# Altium PCB control_block.PcbDoc
Units mm, origin at the board's own origin, x right, y up, seen from the top; angles counter-clockwise.
Board outline 42.5 x 55 mm, 2 copper layers (Top Layer, Bottom Layer), stack 1.5 mm thick; 39 components, 30 nets, 160 pads, 20 vias.
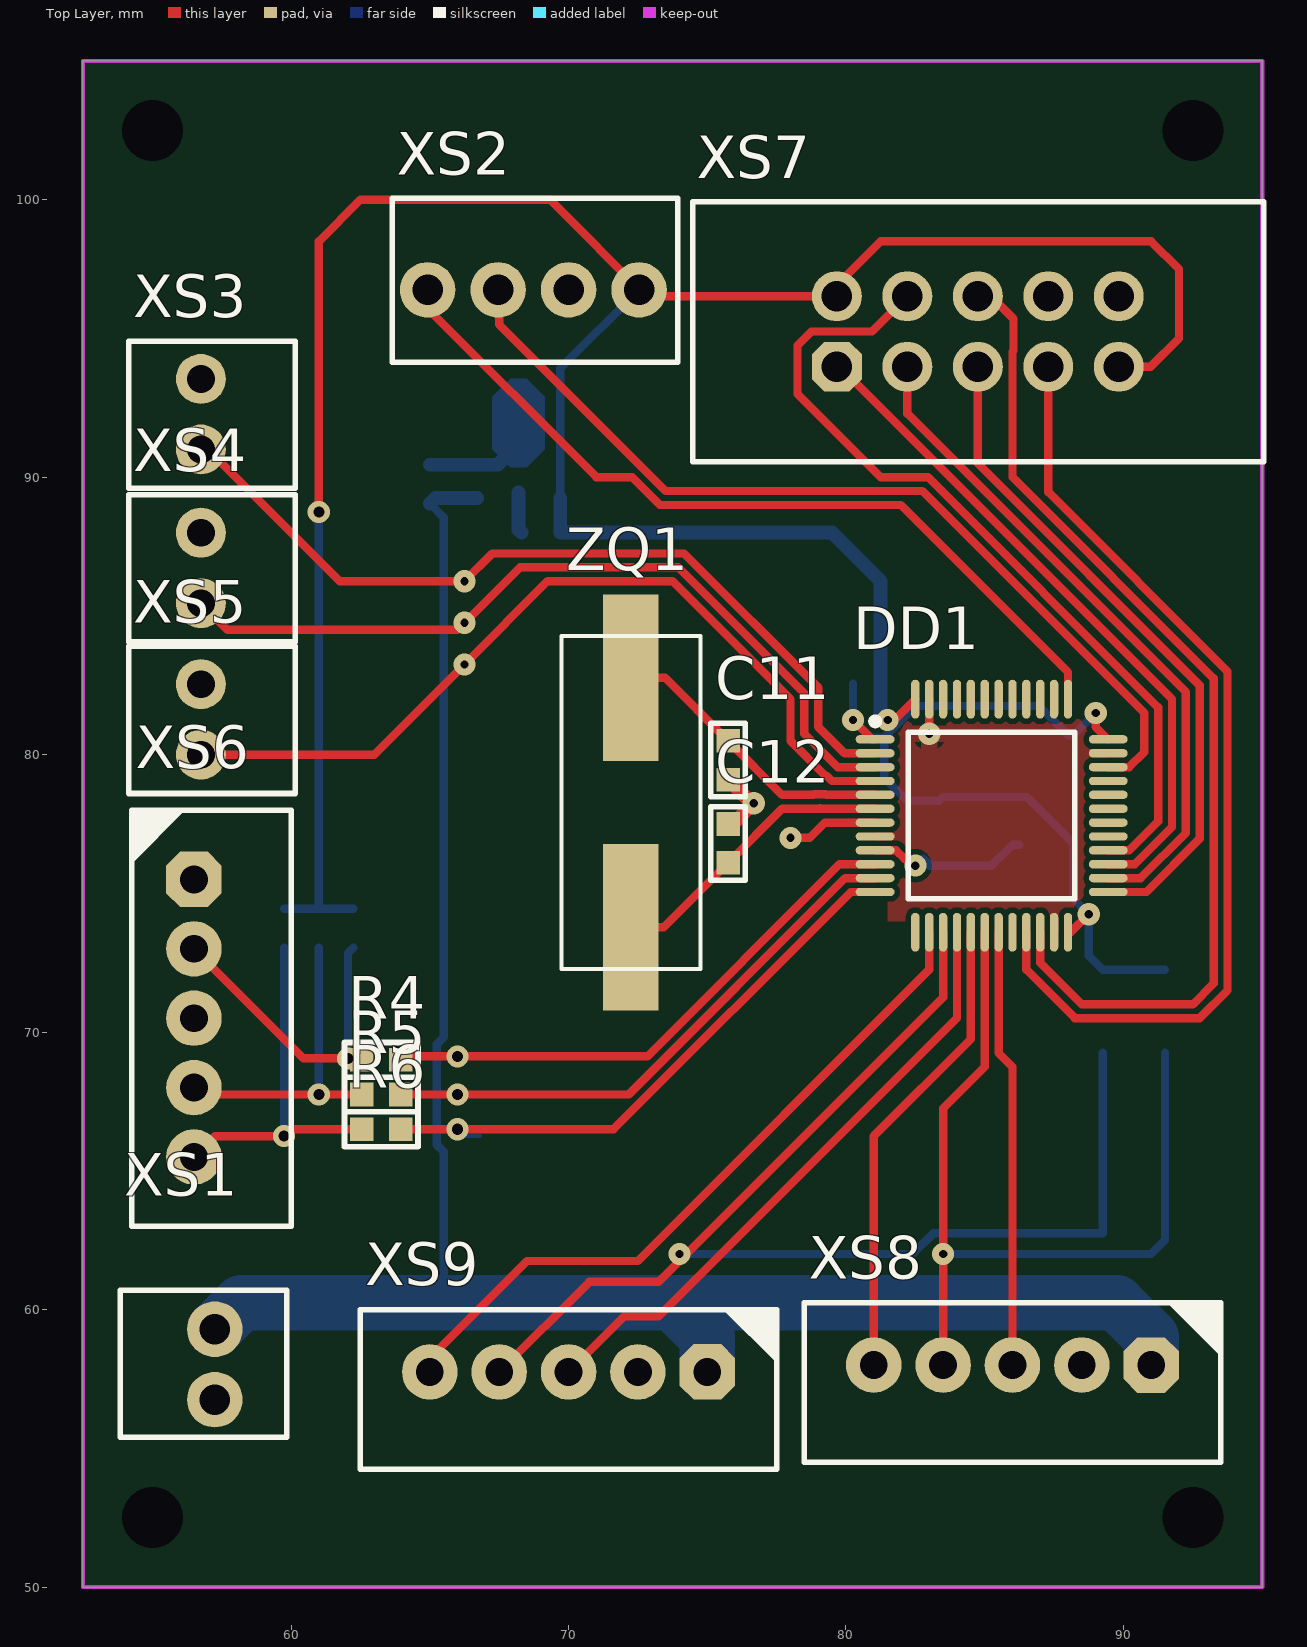
[diagram p0: Top Layer view]
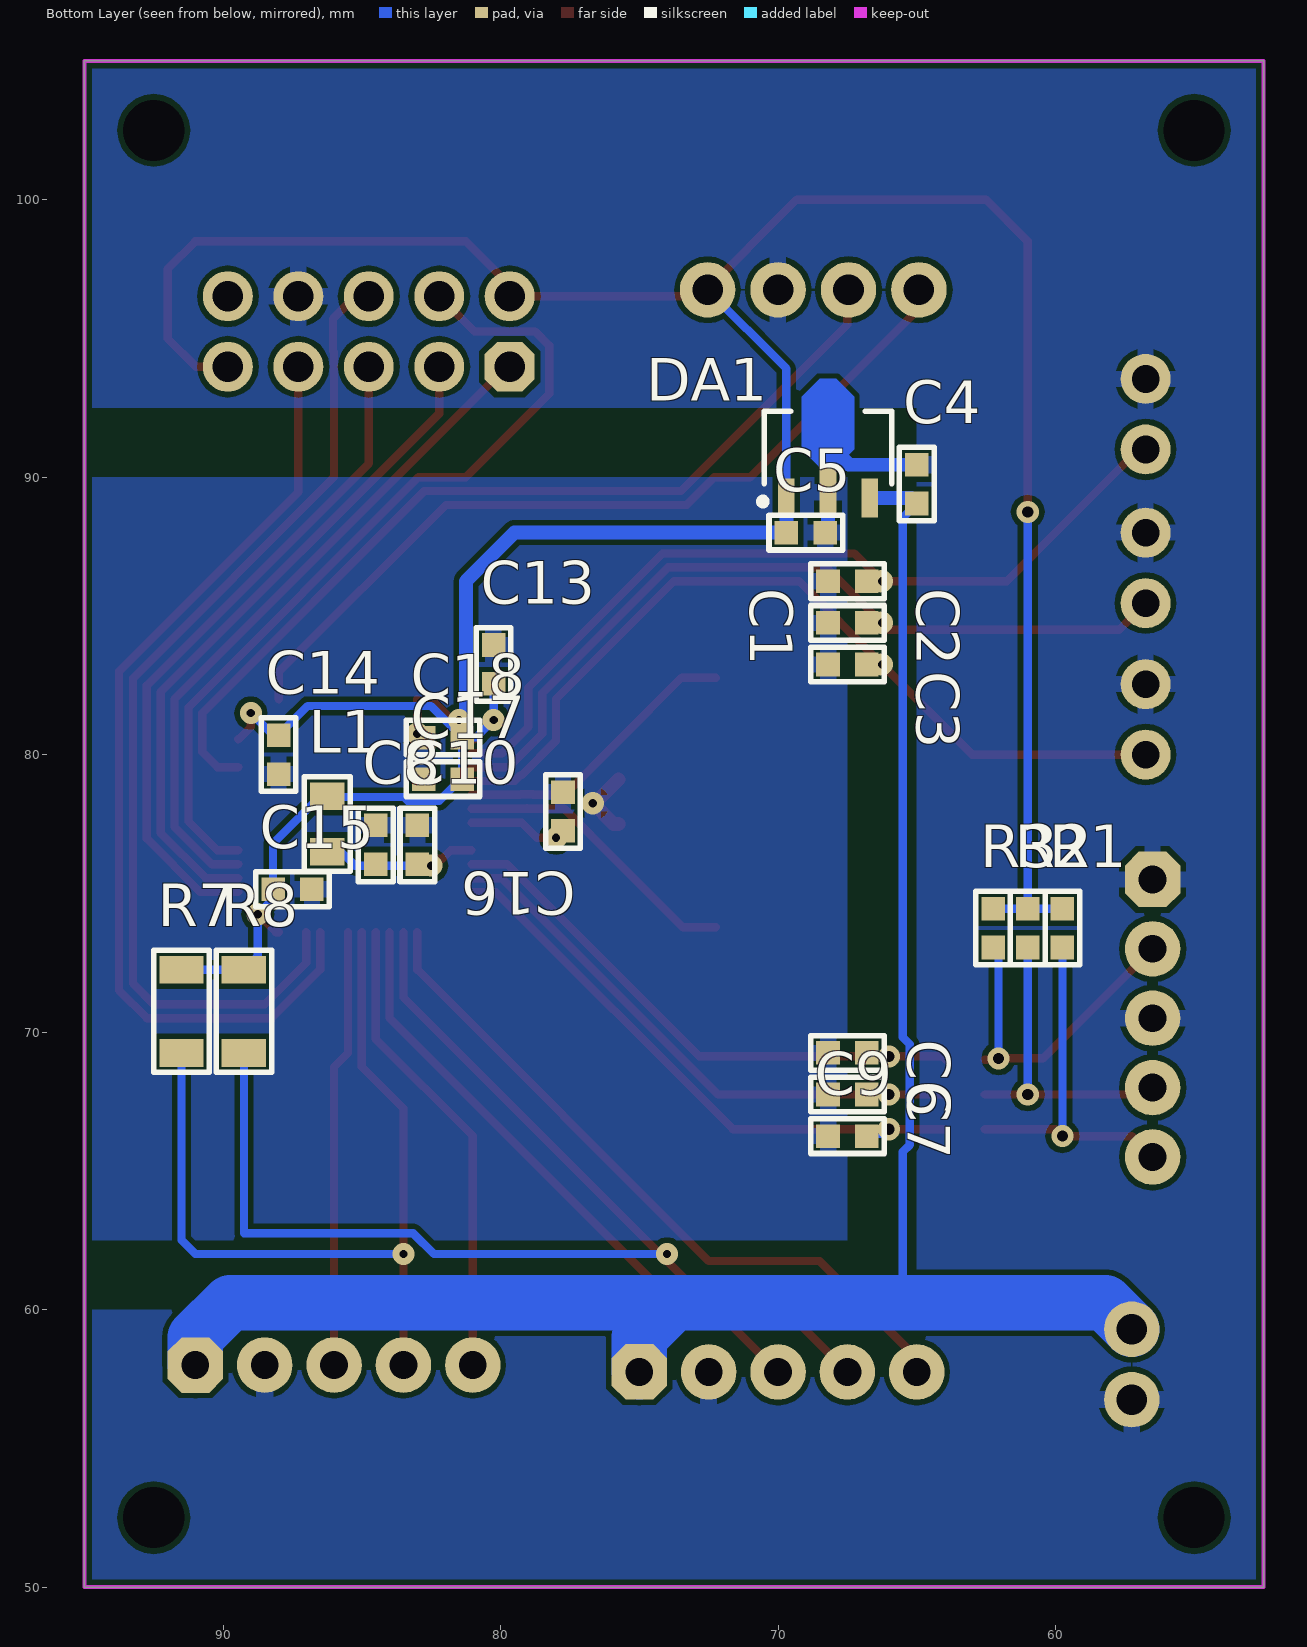
[diagram p1: Bottom Layer view, seen from below]
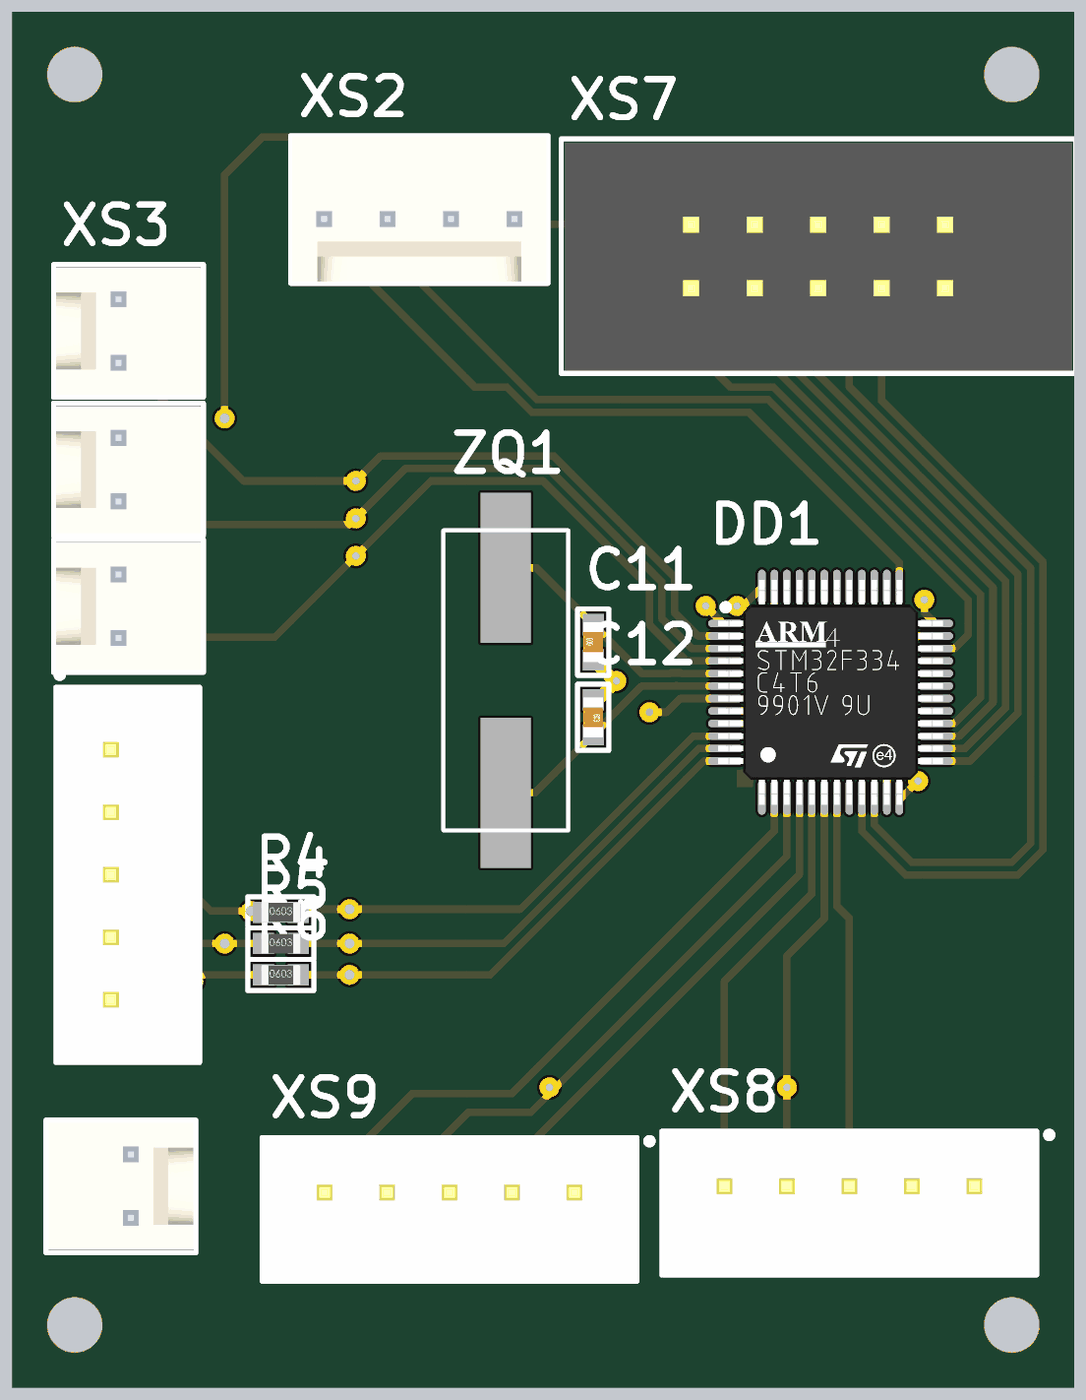
[diagram p2: 3D render of the assembled board from above, using the file's embedded part models]
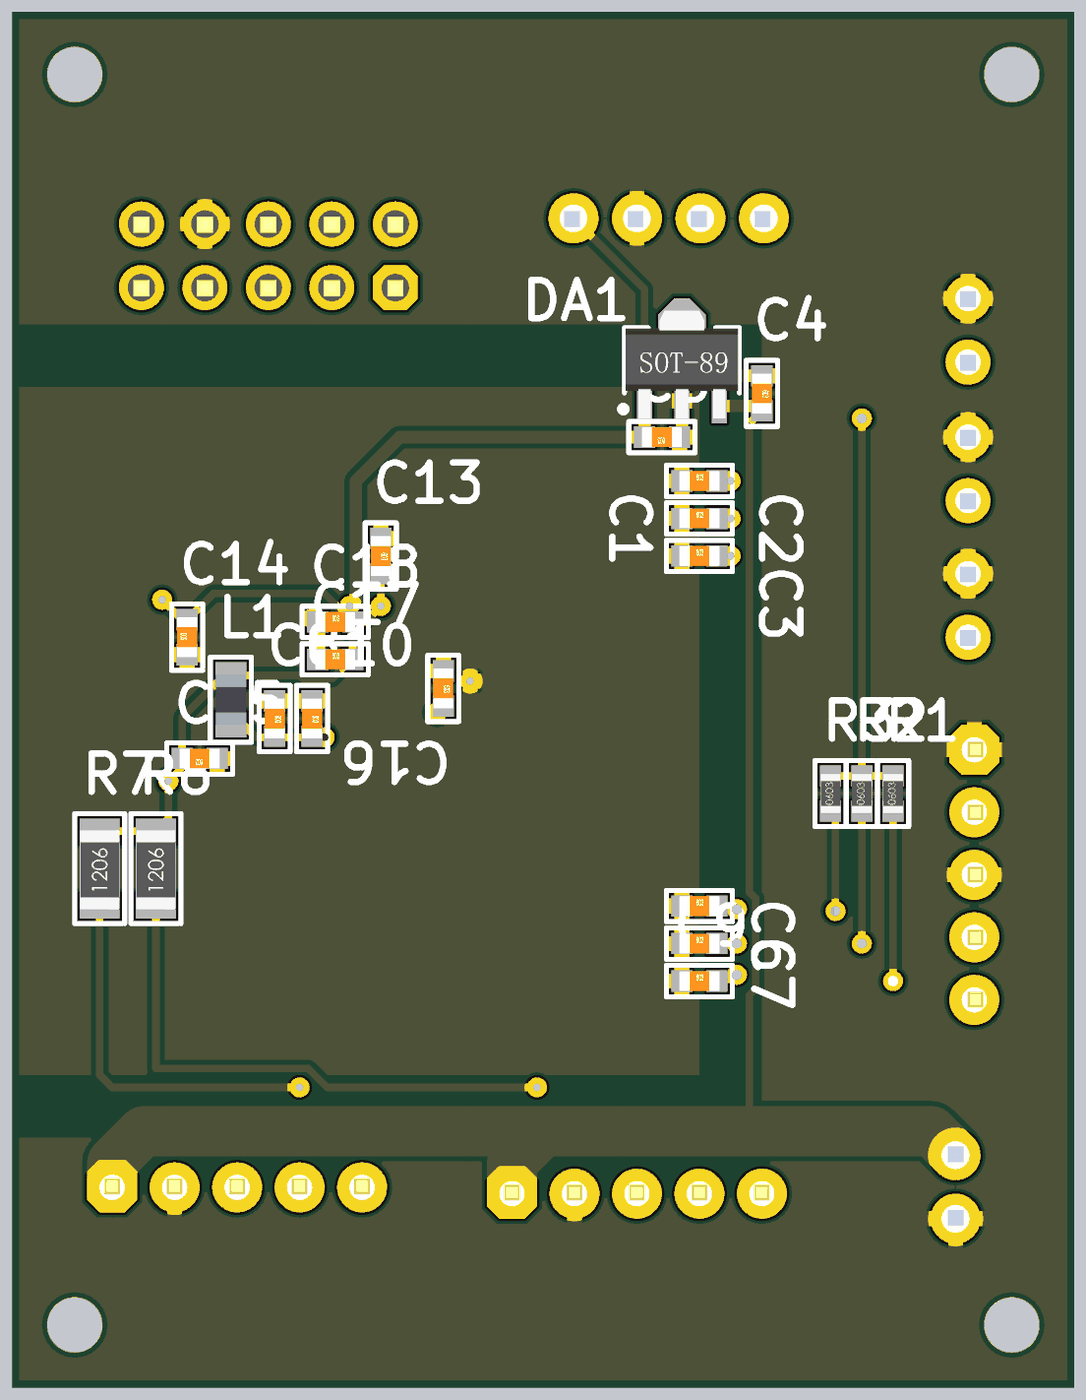
[diagram p3: 3D render of the assembled board from below, using the file's embedded part models]

## Layer stack, top to bottom
Top Layer: signal copper (thickness not stored)
Dielectric 1: dielectric 1.5, FR-4, Dk 4.8
Bottom Layer: signal copper (thickness not stored)

## Board outline
52.5,50 52.5,105 95,105 95,50

## Design rules (kind name [scope] priority, off if disabled: settings)
Clearance [All] p1: gap=0.2 ignorepadtopadclearanceinfootprint=TRUE except(0: Arc-Hole Track-Hole SMDPad-Hole THPad-Hole Via-Hole Fill-Hole Poly-Hole Region-Hole Text-Hole)
ComponentClearance [InComponent('No Component') vs InComponent('No Component')] p1: gap=0.254 collisioncheckmode=3 verticalgap=0.254 showdistances=FALSE
PolygonConnect [All] p1: connectstyle=Relief reliefconductorwidth=0.6 reliefentries=4 polygonreliefangle="90 Angle" airgapwidth=0.2
RoutingVias [All] p1: holewidth=0.5 width=1 viastyle="Through Hole" minholewidth=0.3 minwidth=0.8 maxholewidth=0.7 maxwidth=1.2
SolderMaskExpansion [All] p1: expansion=0.102
Width [All] p1: maxlimit=5 minlimit=0.15 preferedwidth=0.3 minimp=50.000000 maximp=50.000000 favimp=50.000000
29 further rules are at their usual default settings.

## Components (designator, comment, footprint, x,y, rotation, side; value= is the part's Value field where it differs from the comment)
C1 "100 нФ" "CAP: 0603" 67.5,86.25 r180 bottom
C2 "100 нФ" "CAP: 0603" 67.5,84.75 r180 bottom
C3 "100 нФ" "CAP: 0603" 67.5,83.25 r180 bottom
C4 "0.330 мкФ" "CAP: 0603" 65,89.75 r270 bottom
C5 "100 нФ" "CAP: 0603" 69,88 r0 bottom
C6 "100 нФ" "CAP: 0603" 67.5,69.25 r180 bottom
C7 "100 нФ" "CAP: 0603" 67.5,67.75 r180 bottom
C8 "1 мкФ" "CAP: 0603" 84.5,76.75 r270 bottom
C9 "100 нФ" "CAP: 0603" 67.5,66.25 r180 bottom
C10 "10 нФ" "CAP: 0603" 83,76.75 r270 bottom
C11 "22 пФ" "CAP: 0603" 75.75,79.8 r90 top
C12 "22 пФ" "CAP: 0603" 75.75,76.8 r270 top
C13 "100 нФ" "CAP: 0603" 80.25,83.25 r270 bottom
C14 "100 нФ" "CAP: 0603" 88,80 r90 bottom
C15 "100 нФ" "CAP: 0603" 87.5,75.15 r0 bottom
C16 "100 нФ" "CAP: 0603" 77.75,77.95 r270 bottom
C17 "100 нФ" "CAP: 0603" 82.075,79.115 r180 bottom
C18 "4.7 мкФ" "CAP: 0603" 82.075,80.615 r180 bottom
DA1 "78xx" SOT89 68.2,91.05 r90 bottom
DD1 "STM32F103C8T6" 48-LQFP 85.25,77.8 r0 top
L1 "10 мкГн" "IND: 0805" 86.25,77.5 r90 bottom
R1 "Res" "RES: 0603" 59.75,73.75 r90 bottom
R2 "Res" "RES: 0603" 61,73.75 r90 bottom
R3 "Res" "RES: 0603" 62.25,73.75 r90 bottom
R4 "Res" "RES: 0603" 63.25,69 r0 top
R5 "Res" "RES: 0603" 63.25,67.75 r0 top
R6 "Res" "RES: 0603" 63.25,66.5 r0 top
R7 "Res" "RES: 1206" 91.5,70.75 r90 bottom
R8 "Res" "RES: 1206" 89.25,70.75 r90 bottom
XS1 "X2" "CON: WF-02"#1 57.25,59.29 r270 top
XS2 "X4" "CON: WF-04" 72.54,96.75 r180 top
XS3 "X2" "CON: WF-02"#2 56.75,91 r90 top
XS4 "X2" "CON: WF-02"#2 56.75,85.46 r90 top
XS5 "X2" "CON: WF-02"#2 56.75,80 r90 top
XS6 "X5" "CON: CWF-5" 56.5,70.5 r270 top
XS7 "X9" "CON: IDC-10MS" 84.75,95.25 r0 top
XS8 "X5" "CON: CWF-5" 86,58 r180 top
XS9 "X5" "CON: CWF-5" 70,57.75 r180 top
ZQ1 "AT-41CD2-8MHz" AT-41CD2 72.25,78.275 r90 top

## Footprints (in the part's own frame and the unit in brackets; to place one, negate y for a bottom-side part, rotate by r counter-clockwise, add the part's x,y. Pads: shape width x height; smd on the part's side, far side on the other; paste and mask are expansions set on the pad)
48-LQFP [mm] "QFP, 48-Leads, Body 7x7mm, Pitch 0.5mm, IPC Medium Density"
  oval 1.4x0.3 smd: 1(-4.2,2.75) 2(-4.2,2.25) 3(-4.2,1.75) 4(-4.2,1.25) 5(-4.2,0.75) 6(-4.2,0.25) 7(-4.2,-0.25) 8(-4.2,-0.75) 9(-4.2,-1.25) 10(-4.2,-1.75) 11(-4.2,-2.25) 12(-4.2,-2.75) 25(4.2,-2.75) 26(4.2,-2.25) 27(4.2,-1.75) 28(4.2,-1.25) 29(4.2,-0.75) 30(4.2,-0.25) 31(4.2,0.25) 32(4.2,0.75) 33(4.2,1.25) 34(4.2,1.75) 35(4.2,2.25) 36(4.2,2.75)
  oval 0.3x1.4 smd: 13(-2.75,-4.2) 14(-2.25,-4.2) 15(-1.75,-4.2) 16(-1.25,-4.2) 17(-0.75,-4.2) 18(-0.25,-4.2) 19(0.25,-4.2) 20(0.75,-4.2) 21(1.25,-4.2) 22(1.75,-4.2) 23(2.25,-4.2) 24(2.75,-4.2) 37(2.75,4.2) 38(2.25,4.2) 39(1.75,4.2) 40(1.25,4.2) 41(0.75,4.2) 42(0.25,4.2) 43(-0.25,4.2) 44(-0.75,4.2) 45(-1.25,4.2) 46(-1.75,4.2) 47(-2.25,4.2) 48(-2.75,4.2)
  round 0.5 on Mech1: ""(-4,4)
  silkscreen extent -4.32,-3 3,3.52, body extent -4.5,-4.5 4.5,4.5, height 1.6
AT-41CD2 [mm]
  rect 6x2 smd: 1(-4.5,0) 2(4.5,0)
  silkscreen extent -6,-2.5 6,2.5
"CAP: 0603" [mm]
  rect 0.85x0.85 smd: 1(-0.7,0) 2(0.7,0)
  silkscreen extent -1.33,-0.63 1.33,0.63, body extent -0.8,-0.4 0.8,0.4, height 0.3
"CON: CWF-5" [mm]
  oct 2x2 hole 1: 1(-5,0)
  round 2 hole 1: 2(-2.5,0) 3(0,0) 4(2.5,0) 5(5,0)
  round 0.5 on Top Overlay: ""(-8,-2.1)
  silkscreen extent -7.5,-2.25 7.5,3.5, body extent -7.5,-2.25 7.5,3.5, height 7.05
"CON: IDC-10MS" [mm] "IDC-10MS 10 pin PCB-mount header"
  oct 1.8x1.8 hole 1.1: 1(-5.08,-1.27)
  round 1.8 hole 1.1: 2(-5.08,1.27) 3(-2.54,-1.27) 4(-2.54,1.27) 5(0,-1.27) 6(0,1.27) 7(2.54,-1.27) 8(2.54,1.27) 9(5.08,-1.27) 10(5.08,1.27)
  round 0.5 on Mech1: ""(-9.6,-4)
  round 0.5 on Top Overlay: ""(-9.6,-4)
  silkscreen extent -10.28,-4.7 10.3,4.67, body extent -10.14,-4.57 10.16,4.53, height 9
"CON: WF-02"#1 [mm]
  round 2 hole 1.1: 1(0,0) 2(2.54,0)
  round 0.5 on Mech1: ""(-0.8,2)
  silkscreen extent -1.4,-3.4 3.9,2.6, body extent -1.3,-3.3 3.78,2.5, height 11.5
"CON: WF-02"#2 [mm]
  round 1.8 hole 1: 1(0,0) 2(2.54,0)
  round 0.5 on Mech1: ""(-0.8,2)
  silkscreen extent -1.4,-3.4 3.9,2.6, body extent -1.3,-3.3 3.78,2.5, height 11.5
"CON: WF-04" [mm]
  round 2 hole 1.1: 1(0,0) 2(2.54,0) 3(5.08,0) 4(7.62,0)
  round 0.5 on Mech1: ""(-0.8,2)
  silkscreen extent -1.4,-3.3 8.9,2.6, body extent -1.33,-3.27 8.83,2.53, height 11.66
"IND: 0805" [mm]
  rect 1x1.25 smd: 1(-1,0) 2(1,0)
  silkscreen extent -1.7,-0.82 1.7,0.82, body extent -1,-0.62 1,0.63, height 0.85
"RES: 0603" [mm]
  rect 0.85x0.85 smd: 1(-0.7,0) 2(0.7,0)
  silkscreen extent -1.33,-0.63 1.33,0.63, body extent -0.8,-0.4 0.8,0.4, height 0.44
"RES: 1206" [mm]
  rect 1x1.6 smd: 1(-1.5,0) 2(1.5,0)
  silkscreen extent -2.2,-1 2.2,1, body extent -1.65,-0.8 1.55,0.8, height 0.47
SOT89 [mm]
  rect 1.4x0.6 smd: 1(-1.8,1.5) 3(-1.8,-1.5)
  rect 1.8x0.6 smd: 2(-1.6,0)
  round 0.5 on Mech1: ""(-1.8,1.8)
  Top Layer region: -0.7,0.3 -0.05,0.95 1.85,0.95 2.5,0.3 2.5,-0.3 1.85,-0.95 -0.05,-0.95 -0.7,-0.3
  silkscreen extent -2.05,-2.3 1.32,2.48, body extent -2.3,-2.25 2,2.25, height 1.51

## Part data
C1 C2 C3 C4 C5 C6 C7 C8 C9 C10 C11 C12 C13 C14 C15 C16 C17 C18: library part C_const
L1: library part L
ZQ1: library part ZQ
XS1: =address1=A2-XS1:1, =address2=A2-XS1:2, circuit1=+24V, circuit2=GND
XS2: =address1=A2-XS2:1, =address2=A2-XS2:2, =address3=A2-XS2:3, =address4=A2-XS2:4, circuit1=VDD, circuit2=GND, circuit3=SWDIO, circuit4=SWCLK
XS3: =address1=A2-XS3:1, =address2=A2-XS3:2, circuit1=SWITCH, circuit2=GND
XS4: =address1=A2-XS4:1, =address2=A2-XS4:2, circuit1=SWITCH, circuit2=GND
XS5: =address1=A2-XS5:1, =address2=A2-XS5:2, circuit1=SWITCH, circuit2=GND
XS6: =address1=A2-XS6:1, =address2=A2-XS6:2, =address3=A2-XS6:3, =address4=A2-XS6:4, =address5=A2-XS6:5, circuit1=GND, circuit2=SWITCH, circuit3=GND, circuit4=A, cirtuit5=B
XS7: =address1=A2-XS7:1, =address2=A2-XS7:2, =address3=A2-XS7:3, =address4=A2-XS7:4, =address5=A2-XS7:5, =address6=A2-XS7:6, =address7=A2-XS7:7, =address8=A2-XS7:8, =address9=A2-XS7:9, circtuit1=MISO, circtuit2=VDD, circtuit3=SCK, circtuit4=MOSI, circtuit5=CS, circtuit6=RESET, circtuit7=DC, circtuit8=GND, circtuit9=VDD
XS8: =address1=A2-XS8:1, =address2=A2-XS8:2, =address3=A2-XS8:3, =address4=A2-XS8:4, =address5=A2-XS8:5, circuit1=+24V, circuit2=GND, circuit3=PWM, circuit4=TEMP, cirtuit5=SWITCH
XS9: =address1=A2-XS9:1, =address2=A2-XS9:2, =address3=A2-XS9:3, =address4=A2-XS9:4, =address5=A2-XS9:5, circuit1=+24V, circuit2=GND, circuit3=PWM, circuit4=TEMP, cirtuit5=SWITCH

## Free pads (board coordinates)
  round 0 hole 2.2: 2(92.5,102.5) 3(55,102.5) 4(55,52.5) 5(92.5,52.5)

## Via types
v1: diameter 0.8, hole 0.3, Top Layer to Bottom Layer, 13 vias
v2: diameter 0.8, hole 0.4, Top Layer to Bottom Layer, 7 vias

## Nets (pads, with @x,y where several pads share a name; then routed paths per layer and width w, separated by ;. In a path a pad name is that pad's centre, name@x,y a point inside that pad or via, vN(x,y) a via of type N, cw(c..) or ccw(c..) an arc to the next point about the centre after c; other vN are vias at no path point)
+24V: C4.2 DA1.3 XS1.1 XS8.1 XS9.1 | length 69.9
  Bottom Layer w0.3: 65,60.25 65.5,60.75 65.5,65.689 65.25,65.939 65.25,69.561 65.5,69.811 65.5,88.55 C4.2
  Bottom Layer w0.5: C4.2 65.2,89.25 DA1.3
  Bottom Layer w2: XS1.1 58.21,60.25 65,60.25 73.75,60.25 ; XS9.1 75,59 73.75,60.25 ; XS8.1 91,59 89.75,60.25 73.75,60.25
GND: C1.1 C2.1 C3.1 C4.1 C5.1 C6.1 C7.1 C8.1 C9.1 C10.1 C11.1 C12.1 C13.1 C14.1 C15.1 C16.1 C17.1 C18.1 DA1.2 DD1.8 DD1.23 DD1.35 DD1.47 XS1.2 XS2.2 XS3.2 XS4.2 XS5.2 XS6.1 XS6.3 XS7.8 XS8.2 XS9.2 | length 8.8
  Top Layer w0.3: v1(83,80.75) DD1.47
  Top Layer w0.5: C12.1 75.925,77.5 v1(76.675,78.25) 76.6,78.25 C11.1
  Bottom Layer w0.5: C4.1 67.45,90.45 68.25,91.25 ; DA1.2 68.2,88.1 C5.1
NetC1_2: C1.2 DD1.2 XS3.1 | length 30.5
  Top Layer w0.3: XS3.1 57,91 61.75,86.25 v1(66.25,86.25) 67.25,87.25 74.164,87.25 79,82.414 79,81 79.95,80.05 DD1.2
NetC2_2: C2.2 DD1.3 XS4.1 | length 29.5
  Top Layer w0.3: XS4.1 57.71,84.5 66,84.5 v1(66.25,84.75) 68.25,86.75 73.957,86.75 78.5,82.207 78.5,80.75 79.7,79.55 DD1.3
NetC3_2: C3.2 DD1.4 XS5.1 | length 30.7
  Top Layer w0.3: XS5.1 63,80 v1(66.25,83.25) 69.25,86.25 73.75,86.25 78,82 78,80.5 79.25,79.25 79.293,79.25 79.493,79.05 DD1.4
NetC6_2: C6.2 DD1.10 R4.2 | length 20
  Top Layer w0.3: R4.2 64.075,69.125 v2(66,69.125) 72.838,69.125 79.763,76.05 DD1.10
NetC7_2: C7.2 DD1.11 R5.2 | length 20.3
  Top Layer w0.3: R5.2 v2(66,67.75) 72.17,67.75 79.97,75.55 DD1.11
NetC9_2: C9.2 DD1.12 R6.2 | length 21.5
  Top Layer w0.3: R6.2 v2(66,66.5) 71.627,66.5 80.177,75.05 DD1.12
  Bottom Layer w0.15: v2(66,66.5) 66.25,66.25 C9.2
NetC11_2: C11.2 DD1.5 ZQ1.2 | length 10.6
  Top Layer w0.3: ZQ1.2 73.475,82.775 C11.2 77.7,78.55 78.825,78.55 78.848,78.573 79.263,78.573 79.286,78.55 DD1.5
NetC12_2: C12.2 DD1.6 ZQ1.1 | length 10.6
  Top Layer w0.3: ZQ1.1 73.425,73.775 C12.2 77.7,78.05 79.032,78.05 79.055,78.073 79.079,78.05 DD1.6
NetC16_2: C16.2 DD1.7 | length 3.3
  Top Layer w0.3: v1(78,77) 78.689,77 79.239,77.55 DD1.7
NetDD1_14: DD1.14 XS9.5 | length 25.6
  Top Layer w0.3: XS9.5 65,58.25 68.5,61.75 72.5,61.75 83,72.25 DD1.14
NetDD1_15: DD1.15 R8.1 XS9.4 | length 46.4
  Top Layer w0.3: XS9.4 70.75,61 73.25,61 83.5,71.25 DD1.15
  Bottom Layer w0.3: v1(74,62) 74,61.75 74.25,62 82.4,62 83.15,62.75 89.25,62.75 R8.1
NetDD1_16: DD1.16 XS9.3 | length 22.4
  Top Layer w0.3: XS9.3 72,59.75 73.25,59.75 84,70.5 DD1.16
NetDD1_17: DD1.17 XS8.5 | length 17.3
  Top Layer w0.3: XS8.5@81,57.75 81,66.25 84.5,69.75 DD1.17
NetDD1_18: DD1.18 R7.1 XS8.4 | length 31.4
  Top Layer w0.3: XS8.4@83.5,57.75 83.5,67.25 85,68.75 DD1.18
  Bottom Layer w0.3: v1(83.5,62) 91,62 91.5,62.5 R7.1
NetDD1_19: DD1.19 XS8.3 | length 16.1
  Top Layer w0.3: DD1.19 85.5,69.25 86,68.75 XS8.3@86,57.75
NetDD1_21: DD1.21 XS7.7 | length 35.4
  Top Layer w0.3: DD1.21 86.5,72.25 88.25,70.5 92.75,70.5 93.75,71.5 93.75,83 87.29,89.46 XS7.7 XS7.7@87.29,94.46
NetDD1_22: DD1.22 XS7.6 | length 37.1
  Top Layer w0.3: XS7.6@84.75,97 86.04,95.71 86.04,94.558 86,94.518 86,90 93.25,82.75 93.25,71.75 92.5,71 88.5,71 87,72.5 DD1.22
NetDD1_25: DD1.25 XS7.5 | length 24.9
  Top Layer w0.3: XS7.5@84.75,94.46 XS7.5 84.75,90.5 92.75,82.5 92.75,76.972 90.828,75.05 DD1.25
NetDD1_26: DD1.26 XS7.3 | length 24.9
  Top Layer w0.3: XS7.3@82.21,94.46 XS7.3 82.21,92.29 92.25,82.25 92.25,77.179 90.621,75.55 DD1.26
NetDD1_27: DD1.27 XS7.1 | length 24.9
  Top Layer w0.3: XS7.1@79.67,94.46 79.67,94.08 91.75,82 91.75,77.386 90.414,76.05 DD1.27
NetDD1_28: DD1.28 XS7.4 | length 30.5
  Top Layer w0.3: XS7.4 80.94,95.25 78.75,95.25 78.25,94.75 78.25,93 81.25,90 82.957,90 91.25,81.707 91.25,80.5 91.25,77.593 90.207,76.55 DD1.28
NetDD1_34: DD1.34 XS2.3 | length 33.2
  Top Layer w0.3: XS2.3@67.5,96.75 67.5,95.5 73.5,89.5 82.75,89.5 90.75,81.5 90.75,80.093 90.207,79.55 DD1.34
NetDD1_37: DD1.37 XS2.4 | length 30.1
  Top Layer w0.3: XS2.4@64.96,96.75 64.96,96.04 71,90 72.293,90 73.293,89 81.974,89 88,82.974 DD1.37
NetR1_1: R1.1 R6.1 XS6.5 | length 13.3
  Top Layer w0.3: XS6.5 57.25,66.25 v2(59.75,66.25) 60,66.5 R6.1
  Bottom Layer w0.3: v2(59.75,66.25) R1.1
NetR2_1: R2.1 R5.1 XS6.4 | length 11.5
  Top Layer w0.3: XS6.4 56.75,67.75 v2(61,67.75) R5.1
  Bottom Layer w0.3: v2(61,67.75) R2.1
NetR3_1: R3.1 R4.1 XS6.2 | length 11.8
  Top Layer w0.3: XS6.2 60.448,69.052 v2(62.052,69.052) 62.103,69 R4.1
  Bottom Layer w0.3: v2(62.052,69.052) 62.052,72.852 R3.1
VDD: C5.2 C13.2 C14.2 C15.2 C17.2 C18.2 DA1.1 DD1.1 DD1.24 DD1.36 DD1.48 L1.2 R1.2 R2.2 R3.2 R7.2 R8.2 XS2.1 XS7.2 XS7.9 | length 126.2
  Top Layer w0.3: v2(61,88.75) 61,98.5 62.5,100 69.33,100 72.81,96.52 XS7.2 79.67,96.92 81.25,98.5 91,98.5 92,97.5 92,95 90.98,93.98 XS7.9 ; v1(80.25,81.25) 80.95,80.55 DD1.1 ; v1(81.5,81.25) 81.75,81.25 DD1.48 ; DD1.24 88.1,73.6 v1(88.75,74.25) ; v1(89,81.5) 89,81 DD1.36
  Bottom Layer w0.3: R1.2 R2.2 ; v2(61,88.75) R2.2 ; R3.2 R2.2 ; DA1.1 69.7,93.91 XS2.1 ; C13.2 v1(80.25,81.25) 80.885,80.615 C18.2 ; v1(89,81.5) 88.2,80.7 C14.2 86.95,81.75 82.51,81.75 C18.2 ; R7.2 R8.2 88.75,72.75 v1(88.75,74.25) 88.2,74.8 C15.2 88.2,76.8 86.525,78.475 83.489,78.475 83.354,78.34 82.205,78.34 81.43,79.115 C17.2 C18.2
  Bottom Layer w0.5: DA1.1 C5.2 79.5,88 81.25,86.25 81.25,81.5 v1(81.5,81.25)
VDDA: C8.2 C10.2 DD1.9 L1.1 | length 6
  Top Layer w0.3: DD1.9 81.45,76.55 81.807,76.55 82.1,76.257 82.1,76.25 82.25,76.25 v1(82.5,76)
  Bottom Layer w0.3: v1(82.5,76) 82.5,76.05 82.55,76 82.8,76.25 C10.2 ; C10.2@83,76 85.25,76 86,76.75 L1.1@86.25,76.75
pads on no net: DA1. DD1. DD1.13 DD1.20 DD1.29 DD1.30 DD1.31 DD1.32 DD1.33 DD1.38 DD1.39 DD1.40 DD1.41 DD1.42 DD1.43 DD1.44 DD1.45 DD1.46 XS1. XS2. XS3. XS4. XS5. XS6. XS7. XS7.10 XS8. XS9.

## Polygon pours and split planes (outlines as drawn)
GND on Bottom Layer "Bottom Layer-GND 1" (solid, pour order 4): 95,60 95,50 52.5,50 52.5,105 95,105 95,92.5 65,92.5 65,60
GND on Bottom Layer "Bottom Layer-GND" (solid, pour order 0): 67.5,90 67.5,62.5 95,62.5 95,90
GND on Top Layer "Top Layer-GND" (solid, pour order 2): 81.5,81.5 89,81.5 89,74 81.5,74

## Keep-outs
Keep-Out Layer:
  the board outline again, w0.15